# EAGLE board Projeto Fusion (EAGLE 9.7.0)
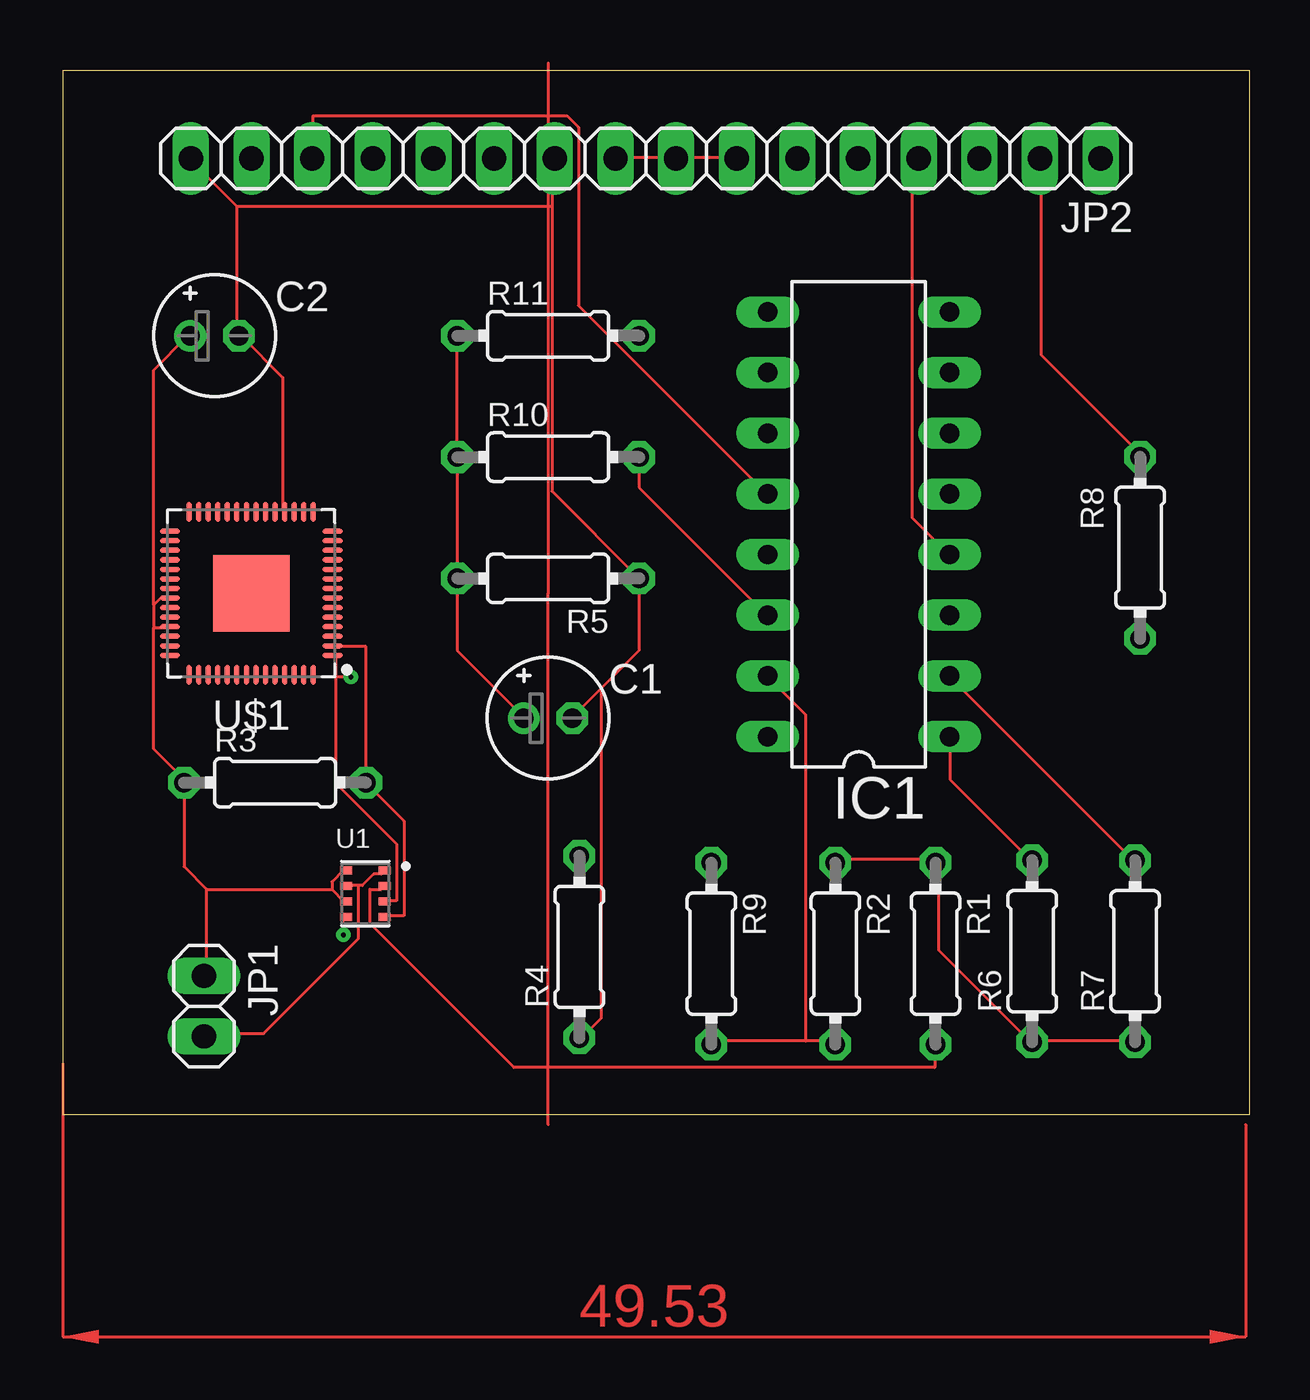
[diagram p0: board, top side]
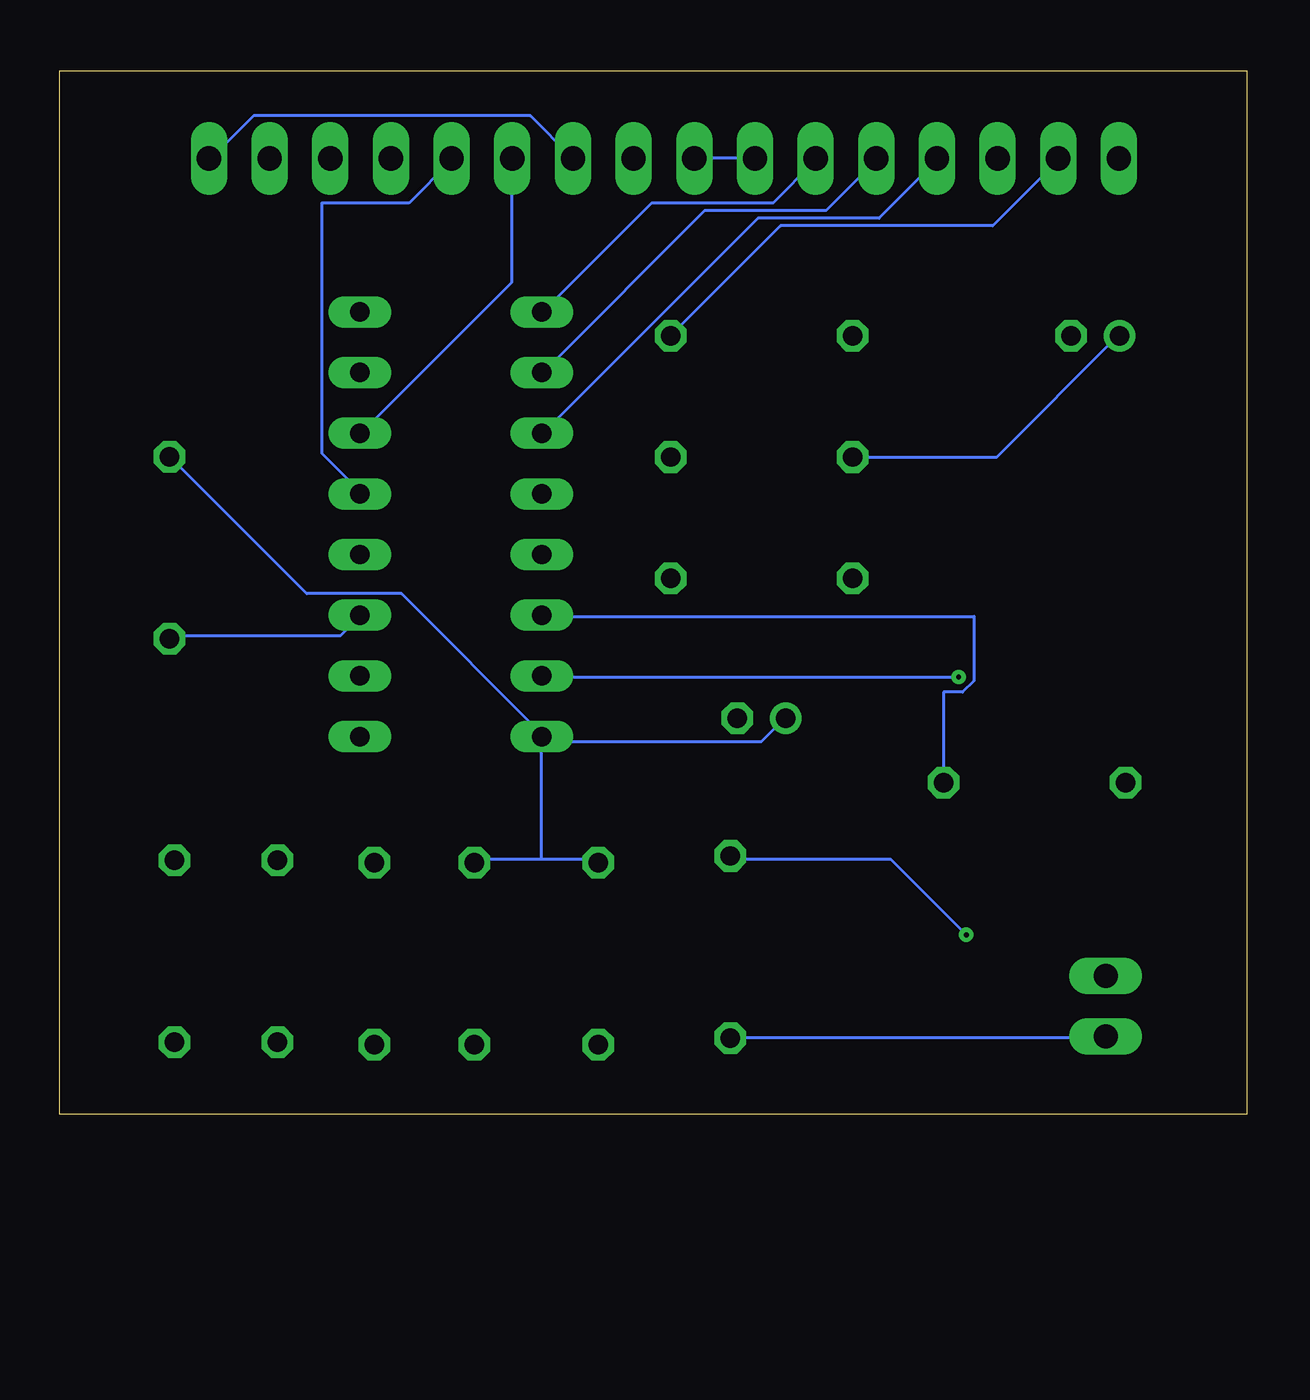
[diagram p1: board, bottom side, seen from below]

Size 49.71 x 43.7 mm. Coordinates in mm from the lower left corner, seen from the top.
Outline: 0,0 49.71,0 49.71,43.7 0,43.7 0,0
Copper layers (1*16): Top 0.035mm / dielectric 1.5mm / Bottom 0.035mm
Design rules "default *": minimum track width 0.12mm, minimum drill 0.2mm, track to track 6mil, track to pad 6mil, pad to pad 6mil, via to via 6mil, smd to smd 6mil, copper to edge 40mil, drill to drill 6mil, minimum pad ring 10mil, minimum via ring 8mil, stop-mask expansion 4mil, vias tented up to drill 0mil, thermal gap 10mil

## Footprints (pad centres in the part's own frame; a part is rotated, then mirrored left to right if it is on the bottom)
E2-5 = drill 0.813 pad 1.27: + -1.016,0 | drill 0.813 pad 1.27 octagon: - 1.016,0
DIL16 = drill 0.813 long: 1 -8.89,-3.81; 2 -6.35,-3.81; 3 -3.81,-3.81; 4 -1.27,-3.81; 5 1.27,-3.81; 6 3.81,-3.81; 7 6.35,-3.81; 8 8.89,-3.81; 9 8.89,3.81; 10 6.35,3.81; 11 3.81,3.81; 12 1.27,3.81; 13 -1.27,3.81; 14 -3.81,3.81; 15 -6.35,3.81; 16 -8.89,3.81
1X02 = drill 1.016 long: 1 -1.27,0; 2 1.27,0
1X16 = drill 1.016 long: 1 -19.05,0; 2 -16.51,0; 3 -13.97,0; 4 -11.43,0; 5 -8.89,0; 6 -6.35,0; 7 -3.81,0; 8 -1.27,0; 9 1.27,0; 10 3.81,0; 11 6.35,0; 12 8.89,0; 13 11.43,0; 14 13.97,0; 15 16.51,0; 16 19.05,0
0204/7 = drill 0.813 octagon: 1 -3.81,0; 2 3.81,0
XDCR_BMP280 = smd 0.5 x 0.35: 1 0.8,0.975; 2 0.8,0.325; 3 0.8,-0.325; 4 0.8,-0.975; 5 -0.8,-0.975; 6 -0.8,-0.325; 7 -0.8,0.325; 8 -0.8,0.975
QFN40P695X695X90-57T320N = smd 0.835 x 0.2: 1 -3.408,2.6; 2 -3.408,2.2; 3 -3.408,1.8; 4 -3.408,1.4; 5 -3.408,1; 6 -3.408,0.6; 7 -3.408,0.2; 8 -3.408,-0.2; 9 -3.408,-0.6; 10 -3.408,-1; 11 -3.408,-1.4; 12 -3.408,-1.8; 13 -3.408,-2.2; 14 -3.408,-2.6; 29 3.408,-2.6; 30 3.408,-2.2; 31 3.408,-1.8; 32 3.408,-1.4; 33 3.408,-1; 34 3.408,-0.6; 35 3.408,-0.2; 36 3.408,0.2; 37 3.408,0.6; 38 3.408,1; 39 3.408,1.4; 40 3.408,1.8; 41 3.408,2.2; 42 3.408,2.6 | smd 0.2 x 0.835: 15 -2.6,-3.408; 16 -2.2,-3.408; 17 -1.8,-3.408; 18 -1.4,-3.408; 19 -1,-3.408; 20 -0.6,-3.408; 21 -0.2,-3.408; 22 0.2,-3.408; 23 0.6,-3.408; 24 1,-3.408; 25 1.4,-3.408; 26 1.8,-3.408; 27 2.2,-3.408; 28 2.6,-3.408; 43 2.6,3.408; 44 2.2,3.408; 45 1.8,3.408; 46 1.4,3.408; 47 1,3.408; 48 0.6,3.408; 49 0.2,3.408; 50 -0.2,3.408; 51 -0.6,3.408; 52 -1,3.408; 53 -1.4,3.408; 54 -1.8,3.408; 55 -2.2,3.408; 56 -2.6,3.408 | smd 3.2 x 3.2: 57 0,0

## Placement (x,y rotation side)
C1  1uF  [E2-5]  20.32,16.59 0 top
C2  0.1uF  [E2-5]  6.35,32.6 0 top
IC1  PCF8574P  [DIL16]  33.33,24.71 90 top
JP1  [1X02]  5.91,4.53 270 top
JP2  [1X16]  24.41,40.03 180 top
R1  10k  [0204/7]  36.54,6.73 270 top
R2  10k  [0204/7]  32.35,6.73 270 top
R3  10k  [0204/7]  8.89,13.89 0 top
R4  10k  [0204/7]  21.63,7.01 90 top
R5  330  [0204/7]  20.32,22.44 180 top
R6  10k  [0204/7]  40.59,6.83 90 top
R7  10k  [0204/7]  44.9,6.83 90 top
R8  10k  [0204/7]  45.11,23.73 270 top
R9  10k  [0204/7]  27.16,6.73 270 top
R10  10k  [0204/7]  20.32,27.52 0 top
R11  10k  [0204/7]  20.32,32.6 0 top
U1  BMP280  [XDCR_BMP280]  12.67,9.24 0 top
U$1  RP2040  [QFN40P695X695X90-57T320N]  7.89,21.82 180 top

## Library data of the parts
C1 C2 = rcl; SPICEPREFIX: C
IC1 = micro-philips; MPN: PCF8574PN; OC_FARNELL: 204020; OC_NEWARK: 11N8515
JP1 JP2 = pinhead
R1-R11 = rcl; SPICEPREFIX: R
U1 = BMP280; AVAILABILITY: In Stock; DESCRIPTION: Pressure Sensor 4.35PSI ~ 15.95PSI (30kPa ~ 110kPa) Absolute 16b 8-SMD; MF: Bosch; MP: BMP280; PACKAGE: SMD-8 Bosch Sensortec; PRICE: None; PURCHASE-URL: https://pricing.snapeda.com/search/part/BMP280/?ref=eda
U$1 = RP2040 (1); AVAILABILITY: In Stock; DESCRIPTION: RP2040 Raspberry Pi Pico - ARM® Cortex®-M0+ MCU 32-Bit Embedded Evaluation Board; MF: Raspberry Pi; MP: RP2040; PACKAGE: Package; PRICE: None; PURCHASE-URL: https://pricing.snapeda.com/search/part/RP2040/?ref=eda

## Nets
CSB: R1.2 U1.2
GND: C1.- C2.- JP1.2 JP2.1 JP2.7 JP2.8 JP2.9 JP2.10 JP2.16 R4.1 R5.1 U1.1 U1.7 U$1.18
GNDA: IC1.8
N$1: IC1.12 JP2.14
N$2: IC1.11 JP2.13
N$3: IC1.10 JP2.12
N$4: IC1.9 JP2.11
N$5: IC1.4 JP2.4
N$6: IC1.7
N$7: IC1.5 JP2.5
N$8: IC1.6 JP2.6
N$9: IC1.1 R6.2
N$10: IC1.2 R7.2
N$11: IC1.3 R8.2
N$12: JP2.3
N$14: JP2.15 R11.2
SCL: IC1.14 R3.2 R10.2 U1.4 U$1.2
SDA: IC1.15 R2.2 R9.2 U1.3 U$1.1
SDO: R4.2 U1.5
VCC: C1.+ C2.+ IC1.16 JP1.1 JP2.2 R1.1 R2.1 R3.1 R5.2 R6.1 R7.1 R8.1 R9.1 R10.1 R11.1 U1.6 U1.8 U$1.36 U$1.39

## Tracks (layer width: path | path; a pad name or v marks a point on that pad's centre or on a via)
CSB
  Top 0.12: U1.2 13.33,9.42 12.86,9.42 12.86,7.99 18.89,1.96 36.51,1.96 36.51,2.91 R1.2
GND
  Top 0.12: 12.38,9.58 12.54,9.58 13.02,10.06 13.33,10.06 U1.1 | 12.38,9.58 11.91,9.58 U1.7 | 12.38,9.58 12.38,7.36 8.41,3.39 6.03,3.39 JP1.2 | 22.54,17.84 24.13,19.42 R5.1 20.48,26.09 20.48,38 | 22.54,17.84 21.43,16.73 C1.- | 22.54,17.84 22.54,4.03 21.75,3.23 R4.1 | U$1.18 9.21,25.3 9.21,30.85 7.46,32.6 C2.- 7.3,32.6 7.3,38 | 7.3,38 5.4,39.9 JP2.16 | JP2.7 28.1,40.06 25.72,40.06 JP2.8 25.56,40.06 23.18,40.06 JP2.9 | 20.48,38 7.3,38 | 20.48,38 20.48,39.9 JP2.10
  Bottom 0.12: JP1.2 6.03,3.23 21.59,3.23 R4.1 | JP2.10 20.64,40.06 23.02,40.06 JP2.9 | JP2.1 43.34,40.06 41.59,41.81 30,41.81 28.26,40.06 JP2.7
N$1
  Top 0.12: IC1.12 29.37,26.09 21.59,33.87 21.59,41.33 21.11,41.81 10.48,41.81 10.48,40.06 JP2.14
N$2
  Bottom 0.12: IC1.11 29.37,28.63 20.48,37.52 15.4,37.52 13.02,39.9 JP2.13
N$3
  Bottom 0.12: IC1.10 29.37,31.17 22.7,37.84 17.62,37.84 15.56,39.9 JP2.12
N$4
  Bottom 0.12: IC1.9 29.37,33.71 24.92,38.16 19.84,38.16 18.1,39.9 JP2.11
N$5
  Top 0.12: IC1.4 36.99,23.55 35.56,24.98 35.56,39.74 35.72,39.9 JP2.4
N$7
  Bottom 0.12: IC1.5 37.15,26.09 38.73,27.68 38.73,38.16 35.08,38.16 33.34,39.9 JP2.5
N$8
  Bottom 0.12: IC1.6 36.99,28.63 30.8,34.82 30.8,39.9 JP2.6
N$9
  Top 0.12: R6.2 40.48,10.69 37.15,14.03 37.15,15.77 IC1.1
N$10
  Top 0.12: IC1.2 37.15,18.31 44.77,10.69 R7.2
N$11
  Bottom 0.12: IC1.3 37.15,20.85 37.94,20.06 45.09,20.06 R8.2
N$14
  Bottom 0.12: R11.2 19.53,37.2 10.64,37.2 7.94,39.9 JP2.15
SCL
  Top 0.12: U1.4 13.49,8.31 14.29,8.31 14.29,12.28 12.7,13.87 R3.2 12.7,19.58 11.43,19.58 U$1.2 | R10.2 24.13,26.25 29.37,21.01 IC1.14
  Bottom 0.12: R3.2 12.7,17.68 11.91,17.68 11.43,18.15 11.43,20.85 29.37,20.85 IC1.14
SDA  (via drill 0.2)
  Top 0.12: 11.43,18.31 11.43,19.27 U$1.1 | 11.43,18.31 11.43,13.87 13.97,11.33 13.97,8.95 13.49,8.95 U1.3 | 31.11,3.07 32.23,3.07 R2.2 | 31.11,3.07 27.3,3.07 R9.2 | 31.11,3.07 31.11,16.73 29.53,18.31 IC1.15 | v12.06,18.31 11.43,18.31
  Bottom 0.12: v12.06,18.31 29.37,18.31 IC1.15
SDO  (via drill 0.2)
  Top 0.12: v11.75,7.52 11.75,8.15 U1.5
  Bottom 0.12: v11.75,7.52 14.92,10.69 21.59,10.69 R4.2
VCC
  Top 0.12: 11.27,9.42 11.75,8.95 U1.6 | 11.27,9.42 11.27,9.74 11.75,10.22 U1.8 | 6.03,9.42 11.27,9.42 | 6.03,9.42 6.03,5.93 JP1.1 | 3.81,20.38 4.44,20.38 U$1.39 | 3.81,21.33 3.81,20.38 | 3.81,21.33 4.13,21.65 4.44,21.65 U$1.36 | 3.81,20.38 3.81,15.3 5.08,14.03 R3.1 5.08,10.38 6.03,9.42 | 3.81,21.33 3.81,31.17 5.24,32.6 C2.+ | C1.+ 19.21,16.73 16.51,19.42 R5.2 R10.1 R11.1 | R8.1 45.09,27.68 40.96,31.81 40.96,39.9 JP2.2 | R7.1 44.77,3.07 40.64,3.07 R6.1 40.48,3.07 36.67,6.88 36.67,10.53 R1.1 36.51,10.69 32.38,10.69 R2.1
  Bottom 0.12: 29.53,10.69 32.23,10.69 R2.1 | 29.53,10.69 27.3,10.69 R9.1 | 29.53,10.69 29.53,15.61 | 29.53,15.61 29.53,15.77 IC1.16 | R8.1 45.09,27.52 39.37,21.8 35.4,21.8 29.53,15.93 IC1.16 | 29.53,15.61 20.32,15.61 19.37,16.57 C1.+ | 29.53,15.61 IC1.16 | R10.1 10.48,27.52 5.4,32.6 C2.+
(copper drawn outside any net)
  shapes: Top area x2